# EAGLE board column_controller-Panel (EAGLE 9.6.0)
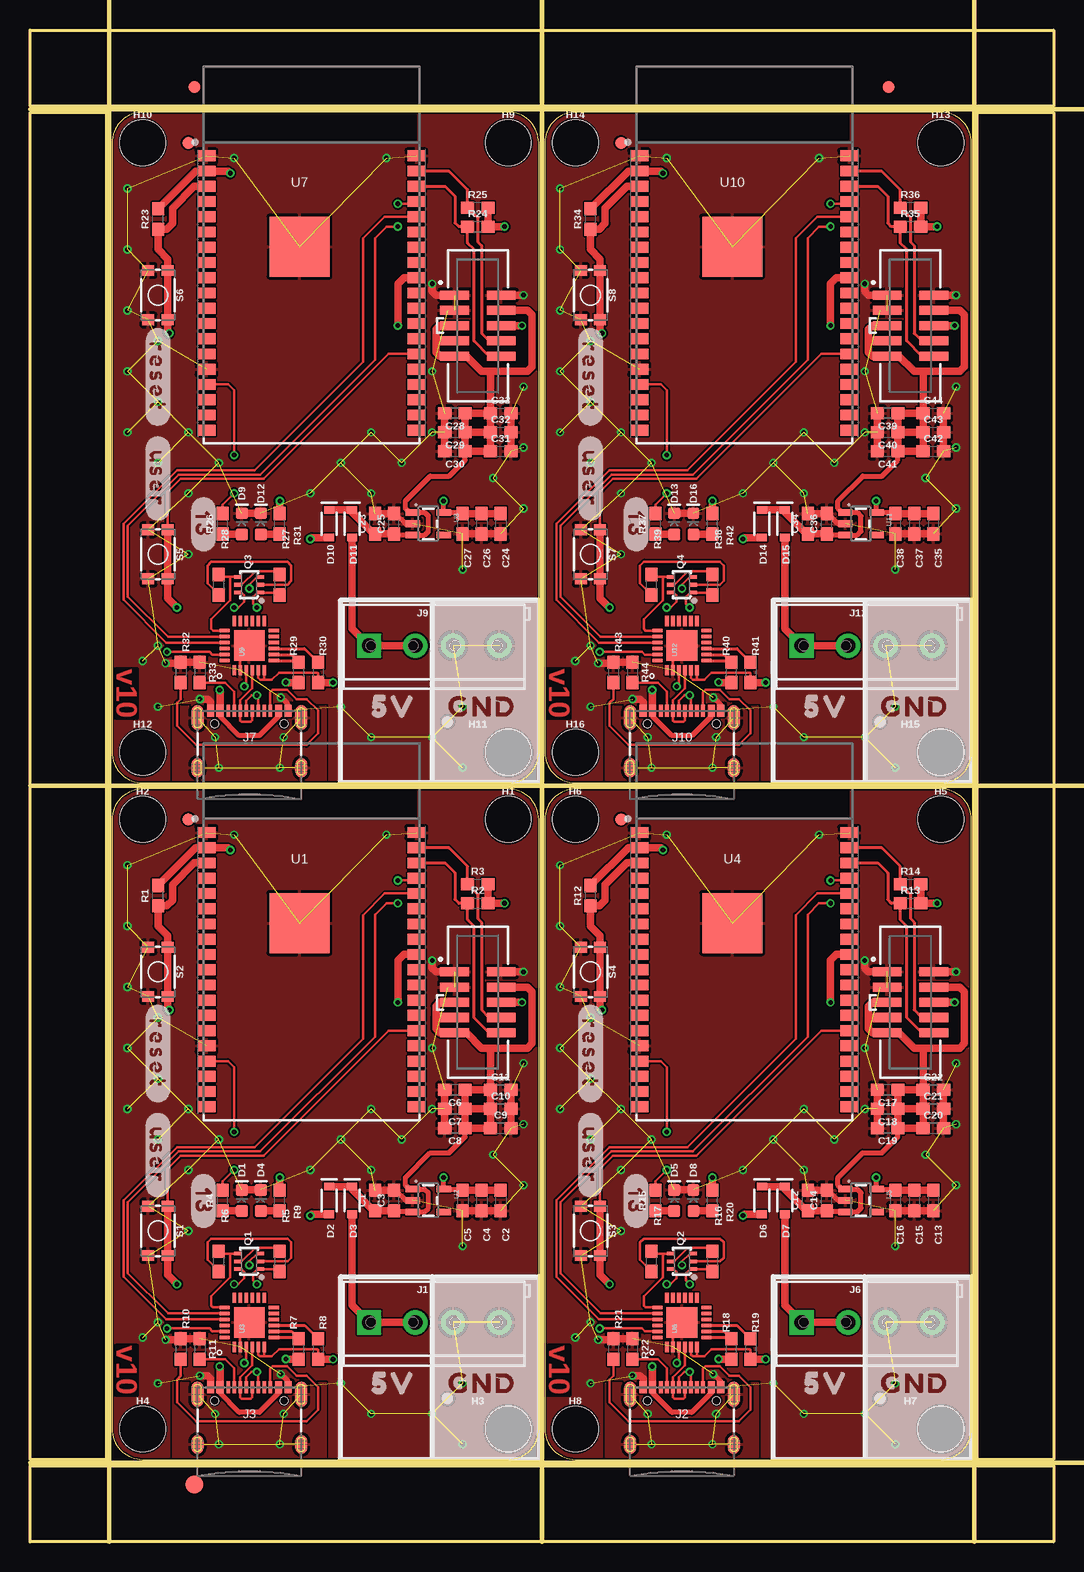
[diagram p0: board, top side]
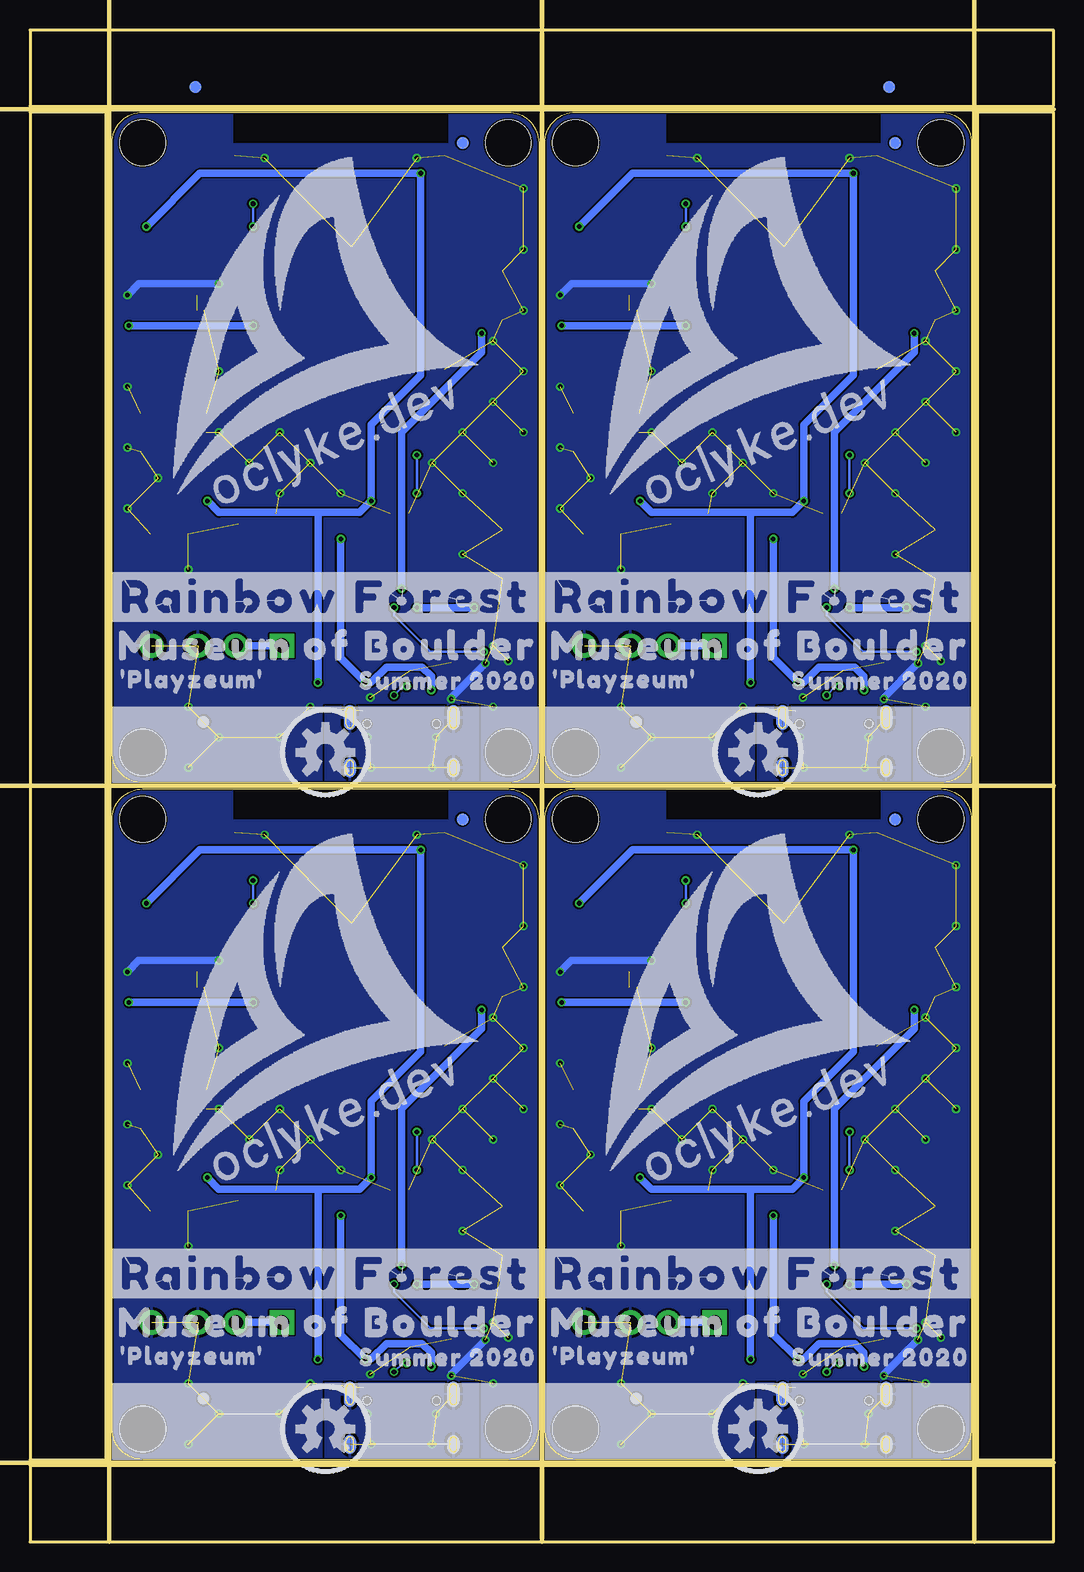
[diagram p1: board, bottom side, seen from below]

Size 85.34 x 125.98 mm. Coordinates in mm from the lower left corner, seen from the top.
Outline: 6.86,60.2 6.86,9.4 arc90 9.4,6.86 39.88,6.86 arc90 42.42,9.4 42.42,60.2 arc90 39.88,62.74 9.4,62.74 arc90 6.86,60.2
Outline: 42.93,60.2 42.93,9.4 arc90 45.47,6.86 75.95,6.86 arc90 78.49,9.4 78.49,60.2 arc90 75.95,62.74 45.47,62.74 arc90 42.93,60.2
Outline: 6.86,116.59 6.86,65.79 arc90 9.4,63.25 39.88,63.25 arc90 42.42,65.79 42.42,116.59 arc90 39.88,119.13 9.4,119.13 arc90 6.86,116.59
Outline: 42.93,116.59 42.93,65.79 arc90 45.47,63.25 75.95,63.25 arc90 78.49,65.79 78.49,116.59 arc90 75.95,119.13 45.47,119.13 arc90 42.93,116.59
Outline: 0,6.35 85.34,6.35 85.34,0 0,0 0,6.35
Outline: 78.99,119.13 85.34,119.13 85.34,6.86 78.99,6.86 78.99,119.13
Outline: 0,125.98 85.34,125.98 85.34,119.63 0,119.63 0,125.98
Outline: 0,119.13 6.35,119.13 6.35,6.86 0,6.86 0,119.13
Copper layers (1*16): Top 0.035mm / dielectric 1.5mm / Bottom 0.035mm
Design rules "column_controller": minimum track width 6mil, minimum drill 0.3mm, track to track 6mil, track to pad 6mil, pad to pad 6mil, via to via 6mil, smd to smd 6mil, copper to edge 6mil, drill to drill 6mil, minimum pad ring 6mil, minimum via ring 6mil, stop-mask expansion 4mil, vias tented up to drill 25mil, thermal gap 10mil
tRestrict: area 14.5,60.2 to 32.3,62.7; area 50.5,60.2 to 68.3,62.7; area 14.5,116.6 to 32.3,119.1; area 50.5,116.6 to 68.3,119.1
bRestrict: area 14.5,60.2 to 32.3,62.7; area 50.5,60.2 to 68.3,62.7; area 14.5,116.6 to 32.3,119.1; area 50.5,116.6 to 68.3,119.1
Milling: 6 lines

## Footprints (pad centres in the part's own frame; a part is rotated, then mirrored left to right if it is on the bottom)
0603 = smd 1.1 x 1: 1 -0.85,0; 2 0.85,0
LED-0603 = smd 1 x 1: A -0.877,0; C 0.877,0
SOD-323 = smd 0.63 x 0.83: A 1.15,0; C -1.15,0
FIDUCIAL-1X2 = smd 1 x 1: 1 0,0
FIDUCIAL-1.5X3 = smd 1.5 x 1.5: 1 0,0
STAND-OFF-#8 = hole 3.81: 0,0
SCREWTERMINAL-3.5MM-4_LOCK = drill 1.2 pad 2.032 square: 1 -0.178,0 | drill 1.2 pad 2.032: 2 3.678,0; 3 6.822,0; 4 10.678,0
USB-C-16P = smd 0.3 x 1: A5 -1.25,-0.34; A6 -0.25,-0.34; A7 0.25,-0.34; A8 1.25,-0.34; B5 1.75,-0.34; B6 0.75,-0.34; B7 -0.75,-0.34; B8 -1.75,-0.34 | smd 0.6 x 1: GND -3.225,-0.34; GND2 3.225,-0.34; VBUS1 -2.45,-0.34; VBUS2 2.45,-0.34 | smd 1 x 2.1: SHLD1 -4.32,-0.915; SHLD2 4.32,-0.915 | smd 1 x 2.1 bottom: SHLD3 -4.32,-0.915; SHLD4 4.32,-0.915 | smd 1 x 1.6: SHLD5 -4.32,-5.095; SHLD8 4.32,-5.095 | smd 1 x 1.6 bottom: SHLD6 -4.32,-5.095; SHLD7 4.32,-5.095 | hole 0.65: -2.89,-1.445; 2.89,-1.445
2X5-SMD-1.27MM = smd 0.76 x 2.4: 1 2.54,1.95; 2 2.54,-1.95; 3 1.27,1.95; 4 1.27,-1.95; 5 0,1.95; 6 0,-1.95; 7 -1.27,1.95; 8 -1.27,-1.95; 9 -2.54,1.95; 10 -2.54,-1.95
SC70-6 = smd 0.3 x 0.66: 1 -0.65,-0.92; 2 0,-0.92; 3 0.65,-0.92; 4 0.65,0.92; 5 0,0.92; 6 -0.65,0.92
TACTILE_SWITCH_SMD_4.6X2.8MM = smd 0.9 x 1: 1 -2.05,-0.8; 2 2.05,-0.8; 3 2.05,0.8; 4 -2.05,0.8
ESP-WROVER-32 = smd 1.5 x 0.9: P$1 0.25,-7.44; P$2 0.25,-8.71; P$3 0.25,-9.98; P$4 0.25,-11.25; P$5 0.25,-12.52; P$6 0.25,-13.79; P$7 0.25,-15.06; P$8 0.25,-16.33; P$9 0.25,-17.6; P$10 0.25,-18.87; P$11 0.25,-20.14; P$12 0.25,-21.41; P$13 0.25,-22.68; P$14 0.25,-23.95; P$15 0.25,-25.22; P$16 0.25,-26.49; P$17 0.25,-27.76; P$18 0.25,-29.03; P$19 0.25,-30.3; P$20 17.75,-30.3; P$21 17.75,-29.03; P$22 17.75,-27.76; P$23 17.75,-26.49; P$24 17.75,-25.22; P$25 17.75,-23.95; P$26 17.75,-22.68; P$27 17.75,-21.41; P$28 17.75,-20.14; P$29 17.75,-18.87; P$30 17.75,-17.6; P$31 17.75,-16.33; P$32 17.75,-15.06; P$33 17.75,-13.79; P$34 17.75,-12.52; P$35 17.75,-11.25; P$36 17.75,-9.98; P$37 17.75,-8.71; P$38 17.75,-7.44 | smd 5 x 5: P$39 8,-15
SOT23-5 = smd 0.55 x 1.2: 1 -0.95,-1.3; 2 0,-1.3; 3 0.95,-1.3; 4 0.95,1.3; 5 -0.95,1.3
QFN24 = smd 0.85 x 0.3: 1 -2.05,1.25; 2 -2.05,0.75; 3 -2.05,0.25; 4 -2.05,-0.25; 5 -2.05,-0.75; 6 -2.05,-1.25; 13 2.05,-1.25; 14 2.05,-0.75; 15 2.05,-0.25; 16 2.05,0.25; 17 2.05,0.75; 18 2.05,1.25 | smd 0.3 x 0.85: 7 -1.25,-2.05; 8 -0.75,-2.05; 9 -0.25,-2.05; 10 0.25,-2.05; 11 0.75,-2.05; 12 1.25,-2.05; 19 1.25,2.05; 20 0.75,2.05; 21 0.25,2.05; 22 -0.25,2.05; 23 -0.75,2.05; 24 -1.25,2.05 | smd 2.55 x 2.55: PAD 0,0

## Placement (x,y rotation side)
C1  0.1uF  [0603]  28.77,28.45 90 top
C2  0.1uF  [0603]  39.24,28.45 270 top
C3  1.0uF  [0603]  30.35,28.45 90 top
C4  1.0uF  [0603]  37.66,28.45 270 top
C5  4.7uF  [0603]  36.07,28.45 270 top
C6  4.7uF  [0603]  35.43,37.66 180 top
C7  1.0uF  [0603]  35.43,36.07 180 top
C8  1.0uF  [0603]  35.43,34.48 180 top
C9  1.0uF  [0603]  39.24,34.48 0 top
C10  0.1uF  [0603]  39.24,36.07 0 top
C11  0.1uF  [0603]  39.24,37.66 0 top
C12  0.1uF  [0603]  64.83,28.45 90 top
C13  0.1uF  [0603]  75.31,28.45 270 top
C14  1.0uF  [0603]  66.42,28.45 90 top
C15  1.0uF  [0603]  73.72,28.45 270 top
C16  4.7uF  [0603]  72.14,28.45 270 top
C17  4.7uF  [0603]  71.5,37.66 180 top
C18  1.0uF  [0603]  71.5,36.07 180 top
C19  1.0uF  [0603]  71.5,34.48 180 top
C20  1.0uF  [0603]  75.31,34.48 0 top
C21  0.1uF  [0603]  75.31,36.07 0 top
C22  0.1uF  [0603]  75.31,37.66 0 top
C23  0.1uF  [0603]  28.77,84.84 90 top
C24  0.1uF  [0603]  39.24,84.84 270 top
C25  1.0uF  [0603]  30.35,84.84 90 top
C26  1.0uF  [0603]  37.66,84.84 270 top
C27  4.7uF  [0603]  36.07,84.84 270 top
C28  4.7uF  [0603]  35.43,94.04 180 top
C29  1.0uF  [0603]  35.43,92.46 180 top
C30  1.0uF  [0603]  35.43,90.87 180 top
C31  1.0uF  [0603]  39.24,90.87 0 top
C32  0.1uF  [0603]  39.24,92.46 0 top
C33  0.1uF  [0603]  39.24,94.04 0 top
C34  0.1uF  [0603]  64.83,84.84 90 top
C35  0.1uF  [0603]  75.31,84.84 270 top
C36  1.0uF  [0603]  66.42,84.84 90 top
C37  1.0uF  [0603]  73.72,84.84 270 top
C38  4.7uF  [0603]  72.14,84.84 270 top
C39  4.7uF  [0603]  71.5,94.04 180 top
C40  1.0uF  [0603]  71.5,92.46 180 top
C41  1.0uF  [0603]  71.5,90.87 180 top
C42  1.0uF  [0603]  75.31,90.87 0 top
C43  0.1uF  [0603]  75.31,92.46 0 top
C44  0.1uF  [0603]  75.31,94.04 0 top
D1  13  [LED-0603]  17.65,28.45 90 top
D2  3A/10V/280mV  [SOD-323]  24.96,28.45 270 top
D3  3A/10V/280mV  [SOD-323]  26.86,28.45 270 top
D4  POWER  [LED-0603]  19.24,28.45 90 top
D5  13  [LED-0603]  53.72,28.45 90 top
D6  3A/10V/280mV  [SOD-323]  61.02,28.45 270 top
D7  3A/10V/280mV  [SOD-323]  62.93,28.45 270 top
D8  POWER  [LED-0603]  55.31,28.45 90 top
D9  13  [LED-0603]  17.65,84.84 90 top
D10  3A/10V/280mV  [SOD-323]  24.96,84.84 270 top
D11  3A/10V/280mV  [SOD-323]  26.86,84.84 270 top
D12  POWER  [LED-0603]  19.24,84.84 90 top
D13  13  [LED-0603]  53.72,84.84 90 top
D14  3A/10V/280mV  [SOD-323]  61.02,84.84 270 top
D15  3A/10V/280mV  [SOD-323]  62.93,84.84 270 top
D16  POWER  [LED-0603]  55.31,84.84 90 top
E$1  [FIDUCIAL-1X2]  13.72,121.22 0 top
E$2  [FIDUCIAL-1X2]  13.72,121.22 0 bottom
E$3  [FIDUCIAL-1X2]  71.56,121.22 0 top
E$4  [FIDUCIAL-1X2]  71.56,121.22 0 bottom
E$5  [FIDUCIAL-1.5X3]  13.72,4.76 0 top
FD1  FIDUCIAL1X2  [FIDUCIAL-1X2]  13.21,60.2 0 top
FD2  FIDUCIAL1X2  [FIDUCIAL-1X2]  34.8,11.94 0 top
FD3  FIDUCIAL1X2  [FIDUCIAL-1X2]  34.8,11.94 0 bottom
FD4  FIDUCIAL1X2  [FIDUCIAL-1X2]  13.21,60.2 0 bottom
FD5  FIDUCIAL1X2  [FIDUCIAL-1X2]  49.28,60.2 0 top
FD6  FIDUCIAL1X2  [FIDUCIAL-1X2]  70.87,11.94 0 top
FD7  FIDUCIAL1X2  [FIDUCIAL-1X2]  70.87,11.94 0 bottom
FD8  FIDUCIAL1X2  [FIDUCIAL-1X2]  49.28,60.2 0 bottom
FD9  FIDUCIAL1X2  [FIDUCIAL-1X2]  13.21,116.59 0 top
FD10  FIDUCIAL1X2  [FIDUCIAL-1X2]  34.8,68.33 0 top
FD11  FIDUCIAL1X2  [FIDUCIAL-1X2]  34.8,68.33 0 bottom
FD12  FIDUCIAL1X2  [FIDUCIAL-1X2]  13.21,116.59 0 bottom
FD13  FIDUCIAL1X2  [FIDUCIAL-1X2]  49.28,116.59 0 top
FD14  FIDUCIAL1X2  [FIDUCIAL-1X2]  70.87,68.33 0 top
FD15  FIDUCIAL1X2  [FIDUCIAL-1X2]  70.87,68.33 0 bottom
FD16  FIDUCIAL1X2  [FIDUCIAL-1X2]  49.28,116.59 0 bottom
H1  STAND-OFF#8  [STAND-OFF-#8]  39.88,60.2 0 top
H2  STAND-OFF#8  [STAND-OFF-#8]  9.4,60.2 0 top
H3  STAND-OFF#8  [STAND-OFF-#8]  39.88,9.4 0 top
H4  STAND-OFF#8  [STAND-OFF-#8]  9.4,9.4 0 top
H5  STAND-OFF#8  [STAND-OFF-#8]  75.95,60.2 0 top
H6  STAND-OFF#8  [STAND-OFF-#8]  45.47,60.2 0 top
H7  STAND-OFF#8  [STAND-OFF-#8]  75.95,9.4 0 top
H8  STAND-OFF#8  [STAND-OFF-#8]  45.47,9.4 0 top
H9  STAND-OFF#8  [STAND-OFF-#8]  39.88,116.59 0 top
H10  STAND-OFF#8  [STAND-OFF-#8]  9.4,116.59 0 top
H11  STAND-OFF#8  [STAND-OFF-#8]  39.88,65.79 0 top
H12  STAND-OFF#8  [STAND-OFF-#8]  9.4,65.79 0 top
H13  STAND-OFF#8  [STAND-OFF-#8]  75.95,116.59 0 top
H14  STAND-OFF#8  [STAND-OFF-#8]  45.47,116.59 0 top
H15  STAND-OFF#8  [STAND-OFF-#8]  75.95,65.79 0 top
H16  STAND-OFF#8  [STAND-OFF-#8]  45.47,65.79 0 top
J1  [SCREWTERMINAL-3.5MM-4_LOCK]  28.45,18.29 0 top
J2  [USB-C-16P]  54.36,13.21 0 top
J3  [USB-C-16P]  18.29,13.21 0 top
J4  JTAG  [2X5-SMD-1.27MM]  37.34,44.96 90 top
J5  JTAG  [2X5-SMD-1.27MM]  73.41,44.96 90 top
J6  [SCREWTERMINAL-3.5MM-4_LOCK]  64.52,18.29 0 top
J7  [USB-C-16P]  18.29,69.6 0 top
J8  JTAG  [2X5-SMD-1.27MM]  37.34,101.35 90 top
J9  [SCREWTERMINAL-3.5MM-4_LOCK]  28.45,74.68 0 top
J10  [USB-C-16P]  54.36,69.6 0 top
J11  JTAG  [2X5-SMD-1.27MM]  73.41,101.35 90 top
J12  [SCREWTERMINAL-3.5MM-4_LOCK]  64.52,74.68 0 top
Q1  [SC70-6]  18.29,23.37 90 top
Q2  [SC70-6]  54.36,23.37 90 top
Q3  [SC70-6]  18.29,79.76 90 top
Q4  [SC70-6]  54.36,79.76 90 top
R1  10k  [0603]  10.67,53.85 90 top
R2  1k  [0603]  37.34,53.21 0 top
R3  1k  [0603]  37.34,54.8 0 top
R4  330  [0603]  16.07,28.45 90 top
R5  10k  [0603]  20.83,23.37 270 top
R6  10k  [0603]  15.75,23.37 90 top
R7  10  [0603]  22.42,16.07 90 top
R8  1k  [0603]  24,16.07 270 top
R9  330  [0603]  20.83,28.45 90 top
R10  5.1k  [0603]  12.57,16.07 270 top
R11  5.1k  [0603]  14.16,16.07 270 top
R12  10k  [0603]  46.74,53.85 90 top
R13  1k  [0603]  73.41,53.21 0 top
R14  1k  [0603]  73.41,54.8 0 top
R15  330  [0603]  52.13,28.45 90 top
R16  10k  [0603]  56.9,23.37 270 top
R17  10k  [0603]  51.82,23.37 90 top
R18  10  [0603]  58.48,16.07 90 top
R19  1k  [0603]  60.07,16.07 270 top
R20  330  [0603]  56.9,28.45 90 top
R21  5.1k  [0603]  48.64,16.07 270 top
R22  5.1k  [0603]  50.23,16.07 270 top
R23  10k  [0603]  10.67,110.24 90 top
R24  1k  [0603]  37.34,109.6 0 top
R25  1k  [0603]  37.34,111.19 0 top
R26  330  [0603]  16.07,84.84 90 top
R27  10k  [0603]  20.83,79.76 270 top
R28  10k  [0603]  15.75,79.76 90 top
R29  10  [0603]  22.42,72.45 90 top
R30  1k  [0603]  24,72.45 270 top
R31  330  [0603]  20.83,84.84 90 top
R32  5.1k  [0603]  12.57,72.45 270 top
R33  5.1k  [0603]  14.16,72.45 270 top
R34  10k  [0603]  46.74,110.24 90 top
R35  1k  [0603]  73.41,109.6 0 top
R36  1k  [0603]  73.41,111.19 0 top
R37  330  [0603]  52.13,84.84 90 top
R38  10k  [0603]  56.9,79.76 270 top
R39  10k  [0603]  51.82,79.76 90 top
R40  10  [0603]  58.48,72.45 90 top
R41  1k  [0603]  60.07,72.45 270 top
R42  330  [0603]  56.9,84.84 90 top
R43  5.1k  [0603]  48.64,72.45 270 top
R44  5.1k  [0603]  50.23,72.45 270 top
S1  Button 0  [TACTILE_SWITCH_SMD_4.6X2.8MM]  10.67,25.91 270 top
S2  !RESET  [TACTILE_SWITCH_SMD_4.6X2.8MM]  10.67,47.5 270 top
S3  Button 0  [TACTILE_SWITCH_SMD_4.6X2.8MM]  46.74,25.91 270 top
S4  !RESET  [TACTILE_SWITCH_SMD_4.6X2.8MM]  46.74,47.5 270 top
S5  Button 0  [TACTILE_SWITCH_SMD_4.6X2.8MM]  10.67,82.3 270 top
S6  !RESET  [TACTILE_SWITCH_SMD_4.6X2.8MM]  10.67,103.89 270 top
S7  Button 0  [TACTILE_SWITCH_SMD_4.6X2.8MM]  46.74,82.3 270 top
S8  !RESET  [TACTILE_SWITCH_SMD_4.6X2.8MM]  46.74,103.89 270 top
U1  ESP-WROVER-32ESP-WROVER-32  [ESP-WROVER-32]  14.48,66.55 0 top
U2  3.3V  [SOT23-5]  33.21,28.45 270 top
U3  CP2102N  [QFN24]  18.29,18.29 90 top
U4  ESP-WROVER-32ESP-WROVER-32  [ESP-WROVER-32]  50.55,66.55 0 top
U5  3.3V  [SOT23-5]  69.28,28.45 270 top
U6  CP2102N  [QFN24]  54.36,18.29 90 top
U7  ESP-WROVER-32ESP-WROVER-32  [ESP-WROVER-32]  14.48,122.94 0 top
U8  3.3V  [SOT23-5]  33.21,84.84 270 top
U9  CP2102N  [QFN24]  18.29,74.68 90 top
U10  ESP-WROVER-32ESP-WROVER-32  [ESP-WROVER-32]  50.55,122.94 0 top
U11  3.3V  [SOT23-5]  69.28,84.84 270 top
U12  CP2102N  [QFN24]  54.36,74.68 90 top
U$1  [5V2]  27.18,13.21 0 top
U$2  [#GND#6]  33.53,13.21 0 top
U$3  [#13#0]  14.48,30.61 270 top
U$4  [#USER#2]  10.67,35.69 270 top
U$5  [#RESET#3]  10.67,44.7 270 top
U$6  [OCL_L#PNG]  24.64,44.96 0 bottom
U$7  [MUSEUM_OF_BOULDER9]  43.69,18.29 0 bottom
U$8  [OCLYKE#DEV7]  36.2,30.35 23 bottom
U$9  [#RAINBOW_FOREST#8]  43.81,22.35 0 bottom
U$10  [SUMMER_202010]  22.86,15.37 0 bottom
U$11  [#PLAYZEUM#10]  42.8,15.49 0 bottom
U$12  [OSHW-LOGO-M]  24.64,9.4 0 bottom
U$13  [5V2]  63.25,13.21 0 top
U$14  [#GND#6]  69.6,13.21 0 top
U$15  [#13#0]  50.55,30.61 270 top
U$16  [#USER#2]  46.74,35.69 270 top
U$17  [#RESET#3]  46.74,44.7 270 top
U$18  [OCL_L#PNG]  60.71,44.96 0 bottom
U$19  [OCLYKE#DEV7]  72.26,30.35 23 bottom
U$20  [MUSEUM_OF_BOULDER9]  79.76,18.29 0 bottom
U$21  [#RAINBOW_FOREST#8]  79.88,22.35 0 bottom
U$22  [SUMMER_202010]  58.93,15.37 0 bottom
U$23  [#PLAYZEUM#10]  78.87,15.49 0 bottom
U$24  [OSHW-LOGO-M]  60.71,9.4 0 bottom
U$25  [5V2]  27.18,69.6 0 top
U$26  [#GND#6]  33.53,69.6 0 top
U$27  [#13#0]  14.48,87 270 top
U$28  [#USER#2]  10.67,92.08 270 top
U$29  [#RESET#3]  10.67,101.09 270 top
U$30  [OCL_L#PNG]  24.64,101.35 0 bottom
U$31  [OCLYKE#DEV7]  36.2,86.74 23 bottom
U$32  [MUSEUM_OF_BOULDER9]  43.69,74.68 0 bottom
U$33  [#RAINBOW_FOREST#8]  43.81,78.74 0 bottom
U$34  [SUMMER_202010]  22.86,71.76 0 bottom
U$35  [#PLAYZEUM#10]  42.8,71.88 0 bottom
U$36  [OSHW-LOGO-M]  24.64,65.79 0 bottom
U$37  [5V2]  63.25,69.6 0 top
U$38  [#GND#6]  69.6,69.6 0 top
U$39  [#13#0]  50.55,87 270 top
U$40  [#USER#2]  46.74,92.08 270 top
U$41  [#RESET#3]  46.74,101.09 270 top
U$42  [OCL_L#PNG]  60.71,101.35 0 bottom
U$43  [OCLYKE#DEV7]  72.26,86.74 23 bottom
U$44  [MUSEUM_OF_BOULDER9]  79.76,74.68 0 bottom
U$45  [#RAINBOW_FOREST#8]  79.88,78.74 0 bottom
U$46  [SUMMER_202010]  58.93,71.76 0 bottom
U$47  [#PLAYZEUM#10]  78.87,71.88 0 bottom
U$48  [OSHW-LOGO-M]  60.71,65.79 0 bottom

## Library data of the parts
C1 C2 C10-C13 C21-C24 C32-C35 C43 C44 = SparkFun-Capacitors; PROD_ID: CAP-00810
C3 C4 C7-C9 C14 C15 C18-C20 C25 C26 C29-C31 C36 C37 C40-C42 = SparkFun-Capacitors; PROD_ID: CAP-13930
C5 C16 C27 C38 = SparkFun-Capacitors; PROD_ID: CAP-14106
C6 C17 C28 C39 = SparkFun-Capacitors; PROD_ID: CAP-08280
D1 D5 D9 D13 = SparkFun-LED; PROD_ID: DIO-08575
D2 D3 D6 D7 D10 D11 D14 D15 = SparkFun-DiscreteSemi; PROD_ID: DIO-14072
D4 D8 D12 D16 = SparkFun-LED; PROD_ID: DIO-00819; VALUE: RED
E$1-E$4 FD1-FD16 U$12 U$24 U$36 U$48 = SparkFun-Aesthetics
E$5 = SparkFun-Retired
H1-H16 = standoff
J1 J6 J9 J12 = SparkFun-Connectors
J2 J3 J7 J10 = SparkFun-Connectors; PROD_ID: CONN-14122
J4 J5 J8 J11 = SparkFun-Connectors; PROD_ID: CONN-14503
Q1-Q4 = SparkFun-DiscreteSemi; PROD_ID: TRANS-13337
R1 R5 R6 R12 R16 R17 R23 R27 R28 R34 R38 R39 = SparkFun-Resistors; PROD_ID: RES-00824
R2 R3 R8 R13 R14 R19 R24 R25 R30 R35 R36 R41 = SparkFun-Resistors; PROD_ID: RES-07856
R4 R9 R15 R20 R26 R31 R37 R42 = SparkFun-Resistors; PROD_ID: RES-00818
R7 R18 R29 R40 = SparkFun-Resistors; PROD_ID: RES-12581
R10 R11 R21 R22 R32 R33 R43 R44 = SparkFun-Resistors; PROD_ID: RES-12083
S1-S8 = SparkFun-Switches; PROD_ID: SWCH-13065
U1 U4 U7 U10 = SparkFun-RF
U2 U5 U8 U11 = SparkFun-IC-Power; PROD_ID: VREG-12457
U3 U6 U9 U12 = SparkFun-IC-Comms; PROD_ID: IC-14020
U$1-U$5 U$7-U$11 U$13-U$17 U$19-U$23 U$25-U$29 U$31-U$35 U$37-U$41 U$43-U$47 = buzzard_labels
U$6 U$18 U$30 U$42 = ocl_L#PNG

## Nets
0: Q1.6 S1.3 S1.4 U1.P$25
1: Q2.6 S3.3 S3.4 U4.P$25
2: R15.2 U4.P$16
3: Q3.6 S5.3 S5.4 U7.P$25
3.3V: C2.1 C4.1 C5.1 R1.2 R2.2 R3.2 R8.2 R9.2 U1.P$2 U2.5 U3.5 U3.6
3.3V1: C13.1 C15.1 C16.1 R12.2 R13.2 R14.2 R19.2 R20.2 U4.P$2 U5.5 U6.5 U6.6
3.3V2: C24.1 C26.1 C27.1 R23.2 R24.2 R25.2 R30.2 R31.2 U7.P$2 U8.5 U9.5 U9.6
3.3V3: C35.1 C37.1 C38.1 R34.2 R35.2 R36.2 R41.2 R42.2 U10.P$2 U11.5 U12.5 U12.6
4: R26.2 U7.P$16
5: Q4.6 S7.3 S7.4 U10.P$25
5V: C1.1 C3.1 C6.1 C7.1 C8.1 C9.1 C10.1 C11.1 D2.C D3.C J4.4 J4.5 J4.7 J4.9 U2.1 U2.3
5V1: C12.1 C14.1 C17.1 C18.1 C19.1 C20.1 C21.1 C22.1 D6.C D7.C J5.4 J5.5 J5.7 J5.9 U5.1 U5.3
5V2: C23.1 C25.1 C28.1 C29.1 C30.1 C31.1 C32.1 C33.1 D10.C D11.C J8.4 J8.5 J8.7 J8.9 U8.1 U8.3
5V3: C34.1 C36.1 C39.1 C40.1 C41.1 C42.1 C43.1 C44.1 D14.C D15.C J11.4 J11.5 J11.7 J11.9 U11.1 U11.3
6: R37.2 U10.P$16
13: R4.2 U1.P$16
!RESET: Q1.3 R1.1 S2.3 S2.4 U1.P$3
!RESET1: Q2.3 R12.1 S4.3 S4.4 U4.P$3
!RESET2: Q3.3 R23.1 S6.3 S6.4 U7.P$3
!RESET3: Q4.3 R34.1 S8.3 S8.4 U10.P$3
DOUT: J4.6 U1.P$30
DOUT1: J5.6 U4.P$30
DOUT2: J8.6 U7.P$30
DOUT3: J11.6 U10.P$30
DTR: Q1.1 R5.2 U3.23
DTR1: Q2.1 R16.2 U6.23
DTR2: Q3.1 R27.2 U9.23
DTR3: Q4.1 R38.2 U12.23
GND: C1.2 C2.2 C3.2 C4.2 C5.2 C6.2 C7.2 C8.2 C9.2 C10.2 C11.2 D1.C D4.C J1.3 J1.4 J3.GND J3.GND2 J4.1 J4.2 J4.3 R10.1 R11.1 S1.1 S1.2 S2.1 S2.2 U1.P$1 U1.P$15 U1.P$38 U1.P$39 U2.2 U3.2 U3.PAD
GND1: C12.2 C13.2 C14.2 C15.2 C16.2 C17.2 C18.2 C19.2 C20.2 C21.2 C22.2 D5.C D8.C J2.GND J2.GND2 J5.1 J5.2 J5.3 J6.3 J6.4 R21.1 R22.1 S3.1 S3.2 S4.1 S4.2 U4.P$1 U4.P$15 U4.P$38 U4.P$39 U5.2 U6.2 U6.PAD
GND2: C23.2 C24.2 C25.2 C26.2 C27.2 C28.2 C29.2 C30.2 C31.2 C32.2 C33.2 D9.C D12.C J7.GND J7.GND2 J8.1 J8.2 J8.3 J9.3 J9.4 R32.1 R33.1 S5.1 S5.2 S6.1 S6.2 U7.P$1 U7.P$15 U7.P$38 U7.P$39 U8.2 U9.2 U9.PAD
GND3: C34.2 C35.2 C36.2 C37.2 C38.2 C39.2 C40.2 C41.2 C42.2 C43.2 C44.2 D13.C D16.C J10.GND J10.GND2 J11.1 J11.2 J11.3 J12.3 J12.4 R43.1 R44.1 S7.1 S7.2 S8.1 S8.2 U10.P$1 U10.P$15 U10.P$38 U10.P$39 U11.2 U12.2 U12.PAD
N$1: J3.A7 J3.B7 U3.4
N$2: J3.A6 J3.B6 U3.3
N$3: Q1.2 R6.1
N$4: D1.A R4.1
N$5: Q1.5 R5.1
N$6: R7.2 U3.7 U3.8
N$7: R8.1 U3.9
N$8: D4.A R9.1
N$9: D5.A R15.1
N$10: J3.A5 R11.2
N$11: J3.B5 R10.2
N$12: Q2.2 R17.1
N$13: Q2.5 R16.1
N$14: J2.A7 J2.B7 U6.4
N$15: J2.A6 J2.B6 U6.3
N$16: R18.2 U6.7 U6.8
N$17: R19.1 U6.9
N$18: D8.A R20.1
N$19: J2.A5 R22.2
N$20: J2.B5 R21.2
N$21: D9.A R26.1
N$22: Q3.2 R28.1
N$23: Q3.5 R27.1
N$24: J7.A7 J7.B7 U9.4
N$25: J7.A6 J7.B6 U9.3
N$26: R29.2 U9.7 U9.8
N$27: R30.1 U9.9
N$28: D12.A R31.1
N$29: J7.A5 R33.2
N$30: J7.B5 R32.2
N$31: D13.A R37.1
N$32: Q4.2 R39.1
N$33: Q4.5 R38.1
N$34: J10.A7 J10.B7 U12.4
N$35: J10.A6 J10.B6 U12.3
N$36: R40.2 U12.7 U12.8
N$37: R41.1 U12.9
N$38: D16.A R42.1
N$39: J10.A5 R44.2
N$40: J10.B5 R43.2
RTS: Q1.4 R6.2 U3.19
RTS1: Q2.4 R17.2 U6.19
RTS2: Q3.4 R28.2 U9.19
RTS3: Q4.4 R39.2 U12.19
RX: U1.P$35 U3.20
RX1: U4.P$35 U6.20
RX2: U7.P$35 U9.20
RX3: U10.P$35 U12.20
SCL: J4.10 R2.1 U1.P$36
SCL1: J5.10 R13.1 U4.P$36
SCL2: J8.10 R24.1 U7.P$36
SCL3: J11.10 R35.1 U10.P$36
SDA: J4.8 R3.1 U1.P$37
SDA1: J5.8 R14.1 U4.P$37
SDA2: J8.8 R25.1 U7.P$37
SDA3: J11.8 R36.1 U10.P$37
SHLD: J3.SHLD1 J3.SHLD2 J3.SHLD3 J3.SHLD4 J3.SHLD5 J3.SHLD6 J3.SHLD7 J3.SHLD8
SHLD1: J2.SHLD1 J2.SHLD2 J2.SHLD3 J2.SHLD4 J2.SHLD5 J2.SHLD6 J2.SHLD7 J2.SHLD8
SHLD2: J7.SHLD1 J7.SHLD2 J7.SHLD3 J7.SHLD4 J7.SHLD5 J7.SHLD6 J7.SHLD7 J7.SHLD8
SHLD3: J10.SHLD1 J10.SHLD2 J10.SHLD3 J10.SHLD4 J10.SHLD5 J10.SHLD6 J10.SHLD7 J10.SHLD8
TX: U1.P$34 U3.21
TX1: U4.P$34 U6.21
TX2: U7.P$34 U9.21
TX3: U10.P$34 U12.21
V_USB: D2.A J3.VBUS1 J3.VBUS2 R7.1
V_USB1: D6.A J2.VBUS1 J2.VBUS2 R18.1
V_USB2: D10.A J7.VBUS1 J7.VBUS2 R29.1
V_USB3: D14.A J10.VBUS1 J10.VBUS2 R40.1
VIN: D3.A J1.1 J1.2
VIN1: D7.A J6.1 J6.2
VIN2: D11.A J9.1 J9.2
VIN3: D15.A J12.1 J12.2

## Tracks (layer width: path | path; a pad name or v marks a point on that pad's centre or on a via)
0  (via drill 0.38)
  Top 0.203: Q1.6 17.63,22.72 17.84,22.5 17.84,21.97 17.34,21.46 v17.02,21.46 | S1.4 11.47,31.1 12.55,32.18 19.48,32.18 29.9,42.6 U1.P$25
  Top 0.61: S1.4 S1.3 11.47,22.25 v12.25,21.46
  Bottom 0.61: v17.02,21.46 v12.25,21.46
1  (via drill 0.38)
  Top 0.203: Q2.6 53.7,22.72 53.91,22.5 53.91,21.97 53.4,21.46 v53.09,21.46 | S3.4 47.54,31.1 48.62,32.18 55.55,32.18 65.97,42.6 U4.P$25
  Top 0.61: S3.4 S3.3 47.54,22.25 v48.32,21.46
  Bottom 0.61: v53.09,21.46 v48.32,21.46
2  (via drill 0.38)
  Top 0.203: R15.2 52.13,30.04 v53.09,30.99 | v53.09,34.16 53.09,39.56 52.59,40.06 U4.P$16
  Bottom 0.203: v53.09,30.99 v53.09,34.16
3  (via drill 0.38)
  Top 0.203: Q3.6 17.63,79.11 17.84,78.89 17.84,78.36 17.34,77.85 v17.02,77.85 | S5.4 11.47,87.49 12.55,88.57 19.48,88.57 29.9,98.99 U7.P$25
  Top 0.61: S5.4 S5.3 11.47,78.64 v12.25,77.85
  Bottom 0.61: v17.02,77.85 v12.25,77.85
3.3V  (via drill 0.38)
  Top 0.203: R8.2 24,16 23.95,16.05 20.75,16.05 20.14,15.44 19.56,15.44 | 19.56,15.44 19.2,15.44 19.04,15.61 U3.5 | U3.6 19.54,15.46 19.56,15.44
  Top 0.406: C5.1 35.97,29.4 U2.5 34.48,29.43 v34.48,30.35
  Top 0.61: C2.1 C4.1 C5.1 | R8.2 v25.27,15.21 | R9.2 v20.83,30.35 | R1.2 13.81,57.84 U1.P$2 16.52,57.84 v16.7,57.66 | R3.2 R2.2 v39.56,53.21
  Bottom 0.61: v39.56,53.21 35.12,57.66 v16.7,57.66 16.7,40.83 20.83,36.7 v20.83,30.35 21.78,29.4 25.27,29.4 | 25.27,29.4 33.53,29.4 v34.48,30.35 | v25.27,15.21 25.27,29.4
3.3V1  (via drill 0.38)
  Top 0.203: R19.2 60.07,16 60.02,16.05 56.82,16.05 56.21,15.44 55.63,15.44 | 55.63,15.44 55.27,15.44 55.11,15.61 U6.5 | U6.6 55.61,15.46 55.63,15.44
  Top 0.406: C16.1 72.04,29.4 U5.5 70.55,29.43 v70.55,30.35
  Top 0.61: C13.1 C15.1 C16.1 | R19.2 v61.34,15.21 | R20.2 v56.9,30.35 | R12.2 49.88,57.84 U4.P$2 52.59,57.84 v52.77,57.66 | R14.2 R13.2 v75.63,53.21
  Bottom 0.61: v75.63,53.21 71.18,57.66 v52.77,57.66 52.77,40.83 56.9,36.7 v56.9,30.35 57.85,29.4 61.34,29.4 | 61.34,29.4 69.6,29.4 v70.55,30.35 | v61.34,15.21 61.34,29.4
3.3V2  (via drill 0.38)
  Top 0.203: R30.2 24,72.39 23.95,72.44 20.75,72.44 20.14,71.83 19.56,71.83 | 19.56,71.83 19.2,71.83 19.04,72 U9.5 | U9.6 19.54,71.85 19.56,71.83
  Top 0.406: C27.1 35.97,85.79 U8.5 34.48,85.82 v34.48,86.74
  Top 0.61: C24.1 C26.1 C27.1 | R30.2 v25.27,71.6 | R31.2 v20.83,86.74 | R23.2 13.81,114.23 U7.P$2 16.52,114.23 v16.7,114.05 | R25.2 R24.2 v39.56,109.6
  Bottom 0.61: v39.56,109.6 35.12,114.05 v16.7,114.05 16.7,97.22 20.83,93.09 v20.83,86.74 21.78,85.79 25.27,85.79 | 25.27,85.79 33.53,85.79 v34.48,86.74 | v25.27,71.6 25.27,85.79
3.3V3  (via drill 0.38)
  Top 0.203: R41.2 60.07,72.39 60.02,72.44 56.82,72.44 56.21,71.83 55.63,71.83 | 55.63,71.83 55.27,71.83 55.11,72 U12.5 | U12.6 55.61,71.85 55.63,71.83
  Top 0.406: C38.1 72.04,85.79 U11.5 70.55,85.82 v70.55,86.74
  Top 0.61: C35.1 C37.1 C38.1 | R41.2 v61.34,71.6 | R42.2 v56.9,86.74 | R34.2 49.88,114.23 U10.P$2 52.59,114.23 v52.77,114.05 | R36.2 R35.2 v75.63,109.6
  Bottom 0.61: v75.63,109.6 71.18,114.05 v52.77,114.05 52.77,97.22 56.9,93.09 v56.9,86.74 57.85,85.79 61.34,85.79 | 61.34,85.79 69.6,85.79 v70.55,86.74 | v61.34,71.6 61.34,85.79
4  (via drill 0.38)
  Top 0.203: R26.2 16.07,86.42 v17.02,87.38 | v17.02,90.55 17.02,95.95 16.52,96.45 U7.P$16
  Bottom 0.203: v17.02,87.38 v17.02,90.55
5  (via drill 0.38)
  Top 0.203: Q4.6 53.7,79.11 53.91,78.89 53.91,78.36 53.4,77.85 v53.09,77.85 | S7.4 47.54,87.49 48.62,88.57 55.55,88.57 65.97,98.99 U10.P$25
  Top 0.61: S7.4 S7.3 47.54,78.64 v48.32,77.85
  Bottom 0.61: v53.09,77.85 v48.32,77.85
5V
  Top 0.406: C3.1 30.45,27.5 U2.3 32.9,27.5 33.21,27.81 33.21,29.08 32.9,29.4 U2.1 31.62,29.4 31.31,29.72 31.31,30.35 33.37,32.42 34.96,32.42 36.28,33.74 C8.1
  Top 0.61: C3.1 C1.1 28.66,27.6 26.86,29.4 D3.C D2.C | J4.5 34.16,44.96 33.85,44.64 33.85,43.69 | 33.85,43.69 33.85,42.73 34.16,42.42 J4.9 36.38,42.42 37.66,41.15 38.39,41.15 | J4.7 33.85,43.69 | J4.4 41.47,46.23 41.85,45.85 41.85,41.53 41.47,41.15 38.39,41.15 | C7.1 C6.1 C11.1 | C7.1 C8.1 C9.1 C10.1 | C10.1 C11.1 | C11.1 38.39,41.15 | C7.1 C10.1
5V1
  Top 0.406: C14.1 66.52,27.5 U5.3 68.96,27.5 69.28,27.81 69.28,29.08 68.96,29.4 U5.1 67.69,29.4 67.37,29.72 67.37,30.35 69.44,32.42 71.03,32.42 72.35,33.74 C19.1
  Top 0.61: C14.1 C12.1 64.73,27.6 62.93,29.4 D7.C D6.C | J5.5 70.23,44.96 69.91,44.64 69.91,43.69 | 69.91,43.69 69.91,42.73 70.23,42.42 J5.9 72.45,42.42 73.72,41.15 74.46,41.15 | J5.7 69.91,43.69 | J5.4 77.53,46.23 77.91,45.85 77.91,41.53 77.53,41.15 74.46,41.15 | C18.1 C17.1 C22.1 | C18.1 C19.1 C20.1 C21.1 | C21.1 C22.1 | C22.1 74.46,41.15 | C18.1 C21.1
5V2
  Top 0.406: C25.1 30.45,83.89 U8.3 32.9,83.89 33.21,84.2 33.21,85.47 32.9,85.79 U8.1 31.62,85.79 31.31,86.11 31.31,86.74 33.37,88.81 34.96,88.81 36.28,90.13 C30.1
  Top 0.61: C25.1 C23.1 28.66,83.99 26.86,85.79 D11.C D10.C | J8.5 34.16,101.35 33.85,101.03 33.85,100.08 | 33.85,100.08 33.85,99.12 34.16,98.81 J8.9 36.38,98.81 37.66,97.54 38.39,97.54 | J8.7 33.85,100.08 | J8.4 41.47,102.62 41.85,102.23 41.85,97.92 41.47,97.54 38.39,97.54 | C29.1 C28.1 C33.1 | C29.1 C30.1 C31.1 C32.1 | C32.1 C33.1 | C33.1 38.39,97.54 | C29.1 C32.1
5V3
  Top 0.406: C36.1 66.52,83.89 U11.3 68.96,83.89 69.28,84.2 69.28,85.47 68.96,85.79 U11.1 67.69,85.79 67.37,86.11 67.37,86.74 69.44,88.81 71.03,88.81 72.35,90.13 C41.1
  Top 0.61: C36.1 C34.1 64.73,83.99 62.93,85.79 D15.C D14.C | J11.5 70.23,101.35 69.91,101.03 69.91,100.08 | 69.91,100.08 69.91,99.12 70.23,98.81 J11.9 72.45,98.81 73.72,97.54 74.46,97.54 | J11.7 69.91,100.08 | J11.4 77.53,102.62 77.91,102.23 77.91,97.92 77.53,97.54 74.46,97.54 | C40.1 C39.1 C44.1 | C40.1 C41.1 C42.1 C43.1 | C43.1 C44.1 | C44.1 74.46,97.54 | C40.1 C43.1
6  (via drill 0.38)
  Top 0.203: R37.2 52.13,86.42 v53.09,87.38 | v53.09,90.55 53.09,95.95 52.59,96.45 U10.P$16
  Bottom 0.203: v53.09,87.38 v53.09,90.55
13  (via drill 0.38)
  Top 0.203: R4.2 16.07,30.04 v17.02,30.99 | v17.02,34.16 17.02,39.56 16.52,40.06 U1.P$16
  Bottom 0.203: v17.02,30.99 v17.02,34.16
!RESET  (via drill 0.38)
  Top 0.203: Q1.3 18.94,24.02 18.29,23.37 v18.29,23.05 | 11.47,49.4 S2.4
  Top 0.61: U1.P$3 13.71,56.57 11.89,54.75 11.89,53.48 11.41,53 R1.1 10.67,51.31 11.47,50.51 11.47,49.4 | S2.4 S2.3 11.47,44.47 v11.62,44.32
  Bottom 0.61: v11.62,44.32 11.62,42.73 18.29,36.07 v18.29,23.05
!RESET1  (via drill 0.38)
  Top 0.203: Q2.3 55.01,24.02 54.36,23.37 v54.36,23.05 | 47.54,49.4 S4.4
  Top 0.61: U4.P$3 49.77,56.57 47.95,54.75 47.95,53.48 47.47,53 R12.1 46.74,51.31 47.54,50.51 47.54,49.4 | S4.4 S4.3 47.54,44.47 v47.69,44.32
  Bottom 0.61: v47.69,44.32 47.69,42.73 54.36,36.07 v54.36,23.05
!RESET2  (via drill 0.38)
  Top 0.203: Q3.3 18.94,80.41 18.29,79.76 v18.29,79.44 | 11.47,105.79 S6.4
  Top 0.61: U7.P$3 13.71,112.96 11.89,111.14 11.89,109.87 11.41,109.39 R23.1 10.67,107.7 11.47,106.9 11.47,105.79 | S6.4 S6.3 11.47,100.86 v11.62,100.71
  Bottom 0.61: v11.62,100.71 11.62,99.12 18.29,92.46 v18.29,79.44
!RESET3  (via drill 0.38)
  Top 0.203: Q4.3 55.01,80.41 54.36,79.76 v54.36,79.44 | 47.54,105.79 S8.4
  Top 0.61: U10.P$3 49.77,112.96 47.95,111.14 47.95,109.87 47.47,109.39 R34.1 46.74,107.7 47.54,106.9 47.54,105.79 | S8.4 S8.3 47.54,100.86 v47.69,100.71
  Bottom 0.61: v47.69,100.71 47.69,99.12 54.36,92.46 v54.36,79.44
DOUT  (via drill 0.38)
  Top 0.61: J4.6 v41.02,44.96 | U1.P$30 31.17,48.95 30.67,48.45 v30.67,44.96
  Bottom 0.61: v41.02,44.96 v30.67,44.96
DOUT1  (via drill 0.38)
  Top 0.61: J5.6 v77.09,44.96 | U4.P$30 67.24,48.95 66.74,48.45 v66.74,44.96
  Bottom 0.61: v77.09,44.96 v66.74,44.96
DOUT2  (via drill 0.38)
  Top 0.61: J8.6 v41.02,101.35 | U7.P$30 31.17,105.34 30.67,104.84 v30.67,101.35
  Bottom 0.61: v41.02,101.35 v30.67,101.35
DOUT3  (via drill 0.38)
  Top 0.61: J11.6 v77.09,101.35 | U10.P$30 67.24,105.34 66.74,104.84 v66.74,101.35
  Bottom 0.61: v77.09,101.35 v66.74,101.35
DTR  (via drill 0.38)
  Top 0.203: U3.23 15.2,17.54 14.96,17.78 v11.43,17.78 | R5.2 20.63,22.72 Q1.1 18.95,22.72 18.61,22.38 18.61,21.78 v18.92,21.46
  Bottom 0.203: v11.43,17.78 15.88,17.78 18.92,20.83 v18.92,21.46
DTR1  (via drill 0.38)
  Top 0.203: U6.23 51.27,17.54 51.03,17.78 v47.5,17.78 | R16.2 56.7,22.72 Q2.1 55.01,22.72 54.67,22.38 54.67,21.78 v54.99,21.46
  Bottom 0.203: v47.5,17.78 51.94,17.78 54.99,20.83 v54.99,21.46
DTR2  (via drill 0.38)
  Top 0.203: U9.23 15.2,73.93 14.96,74.17 v11.43,74.17 | R27.2 20.63,79.11 Q3.1 18.95,79.11 18.61,78.77 18.61,78.17 v18.92,77.85
  Bottom 0.203: v11.43,74.17 15.88,74.17 18.92,77.22 v18.92,77.85
DTR3  (via drill 0.38)
  Top 0.203: U12.23 51.27,73.93 51.03,74.17 v47.5,74.17 | R38.2 56.7,79.11 Q4.1 55.01,79.11 54.67,78.77 54.67,78.17 v54.99,77.85
  Bottom 0.203: v47.5,74.17 51.94,74.17 54.99,77.22 v54.99,77.85
GND  (via drill 0.38)  (53 unrouted)
  Top 0.203: U3.2 17.54,17.54 U3.PAD
  Top 0.406: U2.2 31.31,28.45 30.46,29.3 C3.2 | v20.9,13.97 21.15,13.72 21.18,13.72 21.51,13.4 J3.GND2
  Top 0.61: C5.2 C4.2 C2.2 | C3.2 C1.2 | J3.GND 15.06,13.58 14.8,13.84 v14.16,13.84 | R11.1 R10.1 12.48,16.83 v11.3,16.83 | D1.C D4.C | J4.2 v41.15,47.5 | J4.3 34.8,46.23 | C6.2 C7.2 C8.2 | C11.2 C10.2 C9.2 | J4.1 33.85,47.5 33.53,47.82 v33.53,48.45
  Bottom 0.61: v14.16,13.84 14.16,13.97 v11.3,16.83 | v41.15,47.5 40.2,48.45 v33.53,48.45
  other vias: 17.02,58.93 29.72,58.93 8.13,56.39 8.13,51.31 8.13,46.23 10.67,43.69 8.13,41.15 10.67,38.61 8.13,36.07 10.67,33.53 13.21,36.07 15.75,33.53 13.21,30.99 13.21,25.91 23.37,30.99 25.91,33.53 28.45,30.99 28.45,36.07 30.99,33.53 33.53,36.07 38.61,32.26 41.15,34.8 41.15,29.72 33.53,41.15 41.15,39.88 36.07,24.64 36.07,13.21 33.53,10.67 25.91,13.21 28.45,10.67 36.07,8.13 10.67,13.21 10.67,18.29 9.4,17.02
  pour Bottom (isolate 0.051, rank 2): 6.86,6.86 6.86,62.74 42.42,62.74 42.42,6.86
  pour Top (isolate 0.051, rank 2): 6.86,6.86 6.86,62.74 42.42,62.74 42.42,6.86
GND1  (via drill 0.38)  (53 unrouted)
  Top 0.203: U6.2 53.61,17.54 U6.PAD
  Top 0.406: U5.2 67.37,28.45 66.52,29.3 C14.2 | v56.97,13.97 57.22,13.72 57.25,13.72 57.58,13.4 J2.GND2
  Top 0.61: C16.2 C15.2 C13.2 | C14.2 C12.2 | J2.GND 51.13,13.58 50.86,13.84 v50.23,13.84 | R22.1 R21.1 48.55,16.83 v47.37,16.83 | D5.C D8.C | J5.2 v77.22,47.5 | J5.3 70.87,46.23 | C17.2 C18.2 C19.2 | C22.2 C21.2 C20.2 | J5.1 69.91,47.5 69.6,47.82 v69.6,48.45
  Bottom 0.61: v50.23,13.84 50.23,13.97 v47.37,16.83 | v77.22,47.5 76.26,48.45 v69.6,48.45
  other vias: 53.09,58.93 65.79,58.93 44.2,56.39 44.2,51.31 44.2,46.23 46.74,43.69 44.2,41.15 46.74,38.61 44.2,36.07 46.74,33.53 49.28,36.07 51.82,33.53 49.28,30.99 49.28,25.91 59.44,30.99 61.98,33.53 64.52,30.99 64.52,36.07 67.06,33.53 69.6,36.07 74.68,32.26 77.22,34.8 77.22,29.72 69.6,41.15 77.22,39.88 72.14,24.64 72.14,13.21 69.6,10.67 61.98,13.21 64.52,10.67 72.14,8.13 46.74,13.21 46.74,18.29 45.47,17.02
  pour Bottom (isolate 0.051, rank 2): 42.93,6.86 42.93,62.74 78.49,62.74 78.49,6.86
  pour Top (isolate 0.051, rank 2): 42.93,6.86 42.93,62.74 78.49,62.74 78.49,6.86
GND2  (via drill 0.38)  (53 unrouted)
  Top 0.203: U9.2 17.54,73.93 U9.PAD
  Top 0.406: U8.2 31.31,84.84 30.46,85.69 C25.2 | v20.9,70.36 21.15,70.11 21.18,70.11 21.51,69.78 J7.GND2
  Top 0.61: C27.2 C26.2 C24.2 | C25.2 C23.2 | J7.GND 15.06,69.96 14.8,70.23 v14.16,70.23 | R33.1 R32.1 12.48,73.22 v11.3,73.22 | D9.C D12.C | J8.2 v41.15,103.89 | J8.3 34.8,102.62 | C28.2 C29.2 C30.2 | C33.2 C32.2 C31.2 | J8.1 33.85,103.89 33.53,104.2 v33.53,104.84
  Bottom 0.61: v14.16,70.23 14.16,70.36 v11.3,73.22 | v41.15,103.89 40.2,104.84 v33.53,104.84
  other vias: 17.02,115.32 29.72,115.32 8.13,112.78 8.13,107.7 8.13,102.62 10.67,100.08 8.13,97.54 10.67,95 8.13,92.46 10.67,89.92 13.21,92.46 15.75,89.92 13.21,87.38 13.21,82.3 23.37,87.38 25.91,89.92 28.45,87.38 28.45,92.46 30.99,89.92 33.53,92.46 38.61,88.65 41.15,91.19 41.15,86.11 33.53,97.54 41.15,96.27 36.07,81.03 36.07,69.6 33.53,67.06 25.91,69.6 28.45,67.06 36.07,64.52 10.67,69.6 10.67,74.68 9.4,73.41
  pour Bottom (isolate 0.051, rank 2): 6.86,63.25 6.86,119.13 42.42,119.13 42.42,63.25
  pour Top (isolate 0.051, rank 2): 6.86,63.25 6.86,119.13 42.42,119.13 42.42,63.25
GND3  (via drill 0.38)  (53 unrouted)
  Top 0.203: U12.2 53.61,73.93 U12.PAD
  Top 0.406: U11.2 67.37,84.84 66.52,85.69 C36.2 | v56.97,70.36 57.22,70.11 57.25,70.11 57.58,69.78 J10.GND2
  Top 0.61: C38.2 C37.2 C35.2 | C36.2 C34.2 | J10.GND 51.13,69.96 50.86,70.23 v50.23,70.23 | R44.1 R43.1 48.55,73.22 v47.37,73.22 | D13.C D16.C | J11.2 v77.22,103.89 | J11.3 70.87,102.62 | C39.2 C40.2 C41.2 | C44.2 C43.2 C42.2 | J11.1 69.91,103.89 69.6,104.2 v69.6,104.84
  Bottom 0.61: v50.23,70.23 50.23,70.36 v47.37,73.22 | v77.22,103.89 76.26,104.84 v69.6,104.84
  other vias: 53.09,115.32 65.79,115.32 44.2,112.78 44.2,107.7 44.2,102.62 46.74,100.08 44.2,97.54 46.74,95 44.2,92.46 46.74,89.92 49.28,92.46 51.82,89.92 49.28,87.38 49.28,82.3 59.44,87.38 61.98,89.92 64.52,87.38 64.52,92.46 67.06,89.92 69.6,92.46 74.68,88.65 77.22,91.19 77.22,86.11 69.6,97.54 77.22,96.27 72.14,81.03 72.14,69.6 69.6,67.06 61.98,69.6 64.52,67.06 72.14,64.52 46.74,69.6 46.74,74.68 45.47,73.41
  pour Bottom (isolate 0.051, rank 2): 42.93,63.25 42.93,119.13 78.49,119.13 78.49,63.25
  pour Top (isolate 0.051, rank 2): 42.93,63.25 42.93,119.13 78.49,119.13 78.49,63.25
N$1
  Top 0.203: J3.A7 18.54,12.06 18.41,11.94 17.65,11.94 17.54,12.05 J3.B7 17.54,13.73 18.54,14.73 U3.4
N$2  (via drill 0.38)
  Top 0.203: J3.A6 18.04,13.72 18.48,14.16 v18.92,14.16 19.04,14.05 J3.B6 | v17.87,14.9 18.04,15.07 U3.3
  Bottom 0.203: v18.92,14.16 18.18,14.9 v17.87,14.9
N$3
  Top 0.203: Q1.2 21.46,23.37 21.78,23.69 21.78,24.96 21.46,25.27 15.11,25.27 14.8,24.96 14.8,23.5 15.75,22.54 R6.1
N$4
  Top 0.61: D1.A 16.09,27.57 R4.1
N$5
  Top 0.203: Q1.5 17.66,23.37 18.8,24.51 20.57,24.51 20.83,24.26 R5.1
N$6
  Top 0.254: U3.8 21.79,17.54 R7.2 22.29,17.04 U3.7
N$7
  Top 0.254: U3.9 22.88,18.04 R8.1
N$8
  Top 0.61: D4.A 20.8,27.57 R9.1
N$9
  Top 0.61: D5.A 52.16,27.57 R15.1
N$10
  Top 0.203: J3.A5 17.04,14.46 16.28,15.21 R11.2
N$11
  Top 0.203: R10.2 12.57,13.84 12.25,13.53 12.25,11.62 13.84,10.03 23.05,10.03 24,10.99 24,12.89 23.05,13.84 22.23,13.84 21.44,14.63 20.24,14.63 20.04,14.43 J3.B5
N$12
  Top 0.203: Q2.2 57.53,23.37 57.85,23.69 57.85,24.96 57.53,25.27 51.18,25.27 50.86,24.96 50.86,23.5 51.82,22.54 R17.1
N$13
  Top 0.203: Q2.5 53.73,23.37 54.87,24.51 56.64,24.51 56.9,24.26 R16.1
N$14
  Top 0.203: J2.A7 54.61,12.06 54.48,11.94 53.72,11.94 53.61,12.05 J2.B7 53.61,13.73 54.61,14.73 U6.4
N$15  (via drill 0.38)
  Top 0.203: J2.A6 54.11,13.72 54.55,14.16 v54.99,14.16 55.11,14.05 J2.B6 | v53.93,14.9 54.11,15.07 U6.3
  Bottom 0.203: v54.99,14.16 54.25,14.9 v53.93,14.9
N$16
  Top 0.254: U6.8 57.86,17.54 R18.2 58.36,17.04 U6.7
N$17
  Top 0.254: U6.9 58.95,18.04 R19.1
N$18
  Top 0.61: D8.A 56.87,27.57 R20.1
N$19
  Top 0.203: J2.A5 53.11,14.46 52.35,15.21 R22.2
N$20
  Top 0.203: R21.2 48.64,13.84 48.32,13.53 48.32,11.62 49.91,10.03 59.12,10.03 60.07,10.99 60.07,12.89 59.12,13.84 58.29,13.84 57.51,14.63 56.31,14.63 56.11,14.43 J2.B5
N$21
  Top 0.61: D9.A 16.09,83.96 R26.1
N$22
  Top 0.203: Q3.2 21.46,79.76 21.78,80.07 21.78,81.34 21.46,81.66 15.11,81.66 14.8,81.34 14.8,79.88 15.75,78.93 R28.1
N$23
  Top 0.203: Q3.5 17.66,79.76 18.8,80.9 20.57,80.9 20.83,80.65 R27.1
N$24
  Top 0.203: J7.A7 18.54,68.45 18.41,68.33 17.65,68.33 17.54,68.44 J7.B7 17.54,70.12 18.54,71.12 U9.4
N$25  (via drill 0.38)
  Top 0.203: J7.A6 18.04,70.11 18.48,70.55 v18.92,70.55 19.04,70.43 J7.B6 | v17.87,71.29 18.04,71.46 U9.3
  Bottom 0.203: v18.92,70.55 18.18,71.29 v17.87,71.29
N$26
  Top 0.254: U9.8 21.79,73.93 R29.2 22.29,73.43 U9.7
N$27
  Top 0.254: U9.9 22.88,74.43 R30.1
N$28
  Top 0.61: D12.A 20.8,83.96 R31.1
N$29
  Top 0.203: J7.A5 17.04,70.85 16.28,71.6 R33.2
N$30
  Top 0.203: R32.2 12.57,70.23 12.25,69.91 12.25,68.01 13.84,66.42 23.05,66.42 24,67.37 24,69.28 23.05,70.23 22.23,70.23 21.44,71.02 20.24,71.02 20.04,70.81 J7.B5
N$31
  Top 0.61: D13.A 52.16,83.96 R37.1
N$32
  Top 0.203: Q4.2 57.53,79.76 57.85,80.07 57.85,81.34 57.53,81.66 51.18,81.66 50.86,81.34 50.86,79.88 51.82,78.93 R39.1
N$33
  Top 0.203: Q4.5 53.73,79.76 54.87,80.9 56.64,80.9 56.9,80.65 R38.1
N$34
  Top 0.203: J10.A7 54.61,68.45 54.48,68.33 53.72,68.33 53.61,68.44 J10.B7 53.61,70.12 54.61,71.12 U12.4
N$35  (via drill 0.38)
  Top 0.203: J10.A6 54.11,70.11 54.55,70.55 v54.99,70.55 55.11,70.43 J10.B6 | v53.93,71.29 54.11,71.46 U12.3
  Bottom 0.203: v54.99,70.55 54.25,71.29 v53.93,71.29
N$36
  Top 0.254: U12.8 57.86,73.93 R40.2 58.36,73.43 U12.7
N$37
  Top 0.254: U12.9 58.95,74.43 R41.1
N$38
  Top 0.61: D16.A 56.87,83.96 R42.1
N$39
  Top 0.203: J10.A5 53.11,70.85 52.35,71.6 R44.2
N$40
  Top 0.203: R43.2 48.64,70.23 48.32,69.91 48.32,68.01 49.91,66.42 59.12,66.42 60.07,67.37 60.07,69.28 59.12,70.23 58.29,70.23 57.51,71.02 56.31,71.02 56.11,70.81 J10.B5
RTS
  Top 0.203: U3.19 15.26,19.54 15.11,19.68 15.11,20.47 16.7,22.06 16.7,24.02 | Q1.4 16.7,24.02 | 16.7,24.02 15.95,24.02 R6.2
RTS1
  Top 0.203: U6.19 51.33,19.54 51.18,19.68 51.18,20.47 52.77,22.06 52.77,24.02 | Q2.4 52.77,24.02 | 52.77,24.02 52.02,24.02 R17.2
RTS2
  Top 0.203: U9.19 15.26,75.93 15.11,76.07 15.11,76.86 16.7,78.45 16.7,80.41 | Q3.4 16.7,80.41 | 16.7,80.41 15.95,80.41 R28.2
RTS3
  Top 0.203: U12.19 51.33,75.93 51.18,76.07 51.18,76.86 52.77,78.45 52.77,80.41 | Q4.4 52.77,80.41 | 52.77,80.41 52.02,80.41 R39.2
RX  (via drill 0.38)
  Top 0.203: U1.P$35 32.05,55.12 v30.67,55.12 | v30.67,53.21 29.72,53.21 28.77,52.26 28.77,42.1 19.2,32.54 12.4,32.54 8.17,28.3 8.17,22.38 11.5,19.04 U3.20
  Bottom 0.203: v30.67,55.12 v30.67,53.21
RX1  (via drill 0.38)
  Top 0.203: U4.P$35 68.12,55.12 v66.74,55.12 | v66.74,53.21 65.79,53.21 64.83,52.26 64.83,42.1 55.27,32.54 48.47,32.54 44.23,28.3 44.23,22.38 47.57,19.04 U6.20
  Bottom 0.203: v66.74,55.12 v66.74,53.21
RX2  (via drill 0.38)
  Top 0.203: U7.P$35 32.05,111.51 v30.67,111.51 | v30.67,109.6 29.72,109.6 28.77,108.65 28.77,98.49 19.2,88.92 12.4,88.92 8.17,84.69 8.17,78.77 11.5,75.43 U9.20
  Bottom 0.203: v30.67,111.51 v30.67,109.6
RX3  (via drill 0.38)
  Top 0.203: U10.P$35 68.12,111.51 v66.74,111.51 | v66.74,109.6 65.79,109.6 64.83,108.65 64.83,98.49 55.27,88.92 48.47,88.92 44.23,84.69 44.23,78.77 47.57,75.43 U12.20
  Bottom 0.203: v66.74,111.51 v66.74,109.6
SCL
  Top 0.254: J4.10 38.29,42.42 37.02,43.69 37.02,51.31 36.49,51.84 R2.1 35.75,53.21 35.43,53.53 35.43,55.75 34.62,56.57 U1.P$36
SCL1
  Top 0.254: J5.10 74.36,42.42 73.09,43.69 73.09,51.31 72.56,51.84 R13.1 71.82,53.21 71.5,53.53 71.5,55.75 70.69,56.57 U4.P$36
SCL2
  Top 0.254: J8.10 38.29,98.81 37.02,100.08 37.02,107.7 36.49,108.23 R24.1 35.75,109.6 35.43,109.92 35.43,112.14 34.62,112.96 U7.P$36
SCL3
  Top 0.254: J11.10 74.36,98.81 73.09,100.08 73.09,107.7 72.56,108.23 R35.1 71.82,109.6 71.5,109.92 71.5,112.14 70.69,112.96 U10.P$36
SDA
  Top 0.254: J4.8 38.29,43.69 37.66,44.32 37.66,51.62 37.36,51.92 37.36,53.93 R3.1 36.49,56.29 34.94,57.84 U1.P$37
SDA1
  Top 0.254: J5.8 74.36,43.69 73.72,44.32 73.72,51.62 73.43,51.92 73.43,53.93 R14.1 72.56,56.29 71,57.84 U4.P$37
SDA2
  Top 0.254: J8.8 38.29,100.08 37.66,100.71 37.66,108.01 37.36,108.31 37.36,110.32 R25.1 36.49,112.67 34.94,114.23 U7.P$37
SDA3
  Top 0.254: J11.8 74.36,100.08 73.72,100.71 73.72,108.01 73.43,108.31 73.43,110.32 R36.1 72.56,112.67 71,114.23 U10.P$37
SHLD  (via drill 0.38)  (11 unrouted)
  other vias: 15.75,8.13 20.83,8.13 15.43,10.67 21.15,10.67
  pour Top (isolate 0.051): 11.94,6.86 11.94,13.21 24.64,13.21 24.64,6.86
  pour Bottom (isolate 0.051): 11.94,6.86 11.94,13.21 24.64,13.21 24.64,6.86
SHLD1  (via drill 0.38)  (11 unrouted)
  other vias: 51.82,8.13 56.9,8.13 51.5,10.67 57.21,10.67
  pour Top (isolate 0.051): 48.01,6.86 48.01,13.21 60.71,13.21 60.71,6.86
  pour Bottom (isolate 0.051): 48.01,6.86 48.01,13.21 60.71,13.21 60.71,6.86
SHLD2  (via drill 0.38)  (11 unrouted)
  other vias: 15.75,64.52 20.83,64.52 15.43,67.06 21.15,67.06
  pour Top (isolate 0.051): 11.94,63.25 11.94,69.6 24.64,69.6 24.64,63.25
  pour Bottom (isolate 0.051): 11.94,63.25 11.94,69.6 24.64,69.6 24.64,63.25
SHLD3  (via drill 0.38)  (11 unrouted)
  other vias: 51.82,64.52 56.9,64.52 51.5,67.06 57.21,67.06
  pour Top (isolate 0.051): 48.01,63.25 48.01,69.6 60.71,69.6 60.71,63.25
  pour Bottom (isolate 0.051): 48.01,63.25 48.01,69.6 60.71,69.6 60.71,63.25
TX
  Top 0.203: U1.P$34 29.58,54.03 27.78,52.22 27.78,41.93 18.74,32.89 12.25,32.89 7.81,28.45 7.81,22.1 11.37,18.54 U3.21
TX1
  Top 0.203: U4.P$34 65.65,54.03 63.84,52.22 63.84,41.93 54.81,32.89 48.32,32.89 43.88,28.45 43.88,22.1 47.44,18.54 U6.21
TX2
  Top 0.203: U7.P$34 29.58,110.42 27.78,108.61 27.78,98.32 18.74,89.28 12.25,89.28 7.81,84.84 7.81,78.49 11.37,74.93 U9.21
TX3
  Top 0.203: U10.P$34 65.65,110.42 63.84,108.61 63.84,98.32 54.81,89.28 48.32,89.28 43.88,84.84 43.88,78.49 47.44,74.93 U12.21
V_USB  (via drill 0.38)
  Top 0.406: J3.VBUS1 15.84,12.41 17.46,10.79 19.12,10.79 20.74,12.41 J3.VBUS2
  Top 0.61: J3.VBUS1 15.84,14.58 v15.81,14.61 | v23.37,27.18 23.49,27.3 D2.A | R7.1 21.36,15.21 v21.34,15.24
  Bottom 0.61: v15.81,14.61 15.81,15.75 16.57,16.51 19.56,16.51 20.83,15.24 v21.34,15.24 23.37,17.27 v23.37,27.18
V_USB1  (via drill 0.38)
  Top 0.406: J2.VBUS1 51.91,12.41 53.53,10.79 55.19,10.79 56.81,12.41 J2.VBUS2
  Top 0.61: J2.VBUS1 51.91,14.58 v51.88,14.61 | v59.44,27.18 59.56,27.3 D6.A | R18.1 57.43,15.21 v57.4,15.24
  Bottom 0.61: v51.88,14.61 51.88,15.75 52.64,16.51 55.63,16.51 56.9,15.24 v57.4,15.24 59.44,17.27 v59.44,27.18
V_USB2  (via drill 0.38)
  Top 0.406: J7.VBUS1 15.84,68.8 17.46,67.18 19.12,67.18 20.74,68.8 J7.VBUS2
  Top 0.61: J7.VBUS1 15.84,70.97 v15.81,70.99 | v23.37,83.57 23.49,83.69 D10.A | R29.1 21.36,71.6 v21.34,71.63
  Bottom 0.61: v15.81,70.99 15.81,72.14 16.57,72.9 19.56,72.9 20.83,71.63 v21.34,71.63 23.37,73.66 v23.37,83.57
V_USB3  (via drill 0.38)
  Top 0.406: J10.VBUS1 51.91,68.8 53.53,67.18 55.19,67.18 56.81,68.8 J10.VBUS2
  Top 0.61: J10.VBUS1 51.91,70.97 v51.88,70.99 | v59.44,83.57 59.56,83.69 D14.A | R40.1 57.43,71.6 v57.4,71.63
  Bottom 0.61: v51.88,70.99 51.88,72.14 52.64,72.9 55.63,72.9 56.9,71.63 v57.4,71.63 59.44,73.66 v59.44,83.57
VIN
  Top 0.61: D3.A 26.86,19.7 J1.1 J1.2
  Bottom 0.61: J1.2 J1.1
VIN1
  Top 0.61: D7.A 62.93,19.7 J6.1 J6.2
  Bottom 0.61: J6.2 J6.1
VIN2
  Top 0.61: D11.A 26.86,76.09 J9.1 J9.2
  Bottom 0.61: J9.2 J9.1
VIN3
  Top 0.61: D15.A 62.93,76.09 J12.1 J12.2
  Bottom 0.61: J12.2 J12.1

## Text on the board
Top: v10 | v10 | v10 | v10
Milling: v-score | v-score | v-score | v-score | v-score | v-score